# Altium PCB Smart_Reclyce_Bin.PcbDoc
Units mm, origin at the board's own origin, x right, y up, seen from the top; angles counter-clockwise.
Board outline 109.97 x 86.04 mm, 2 copper layers (Top Layer, Bottom Layer); 111 components, 161 nets, 340 pads, 98 vias.
Unrouted connection lines stored in the file: 16.
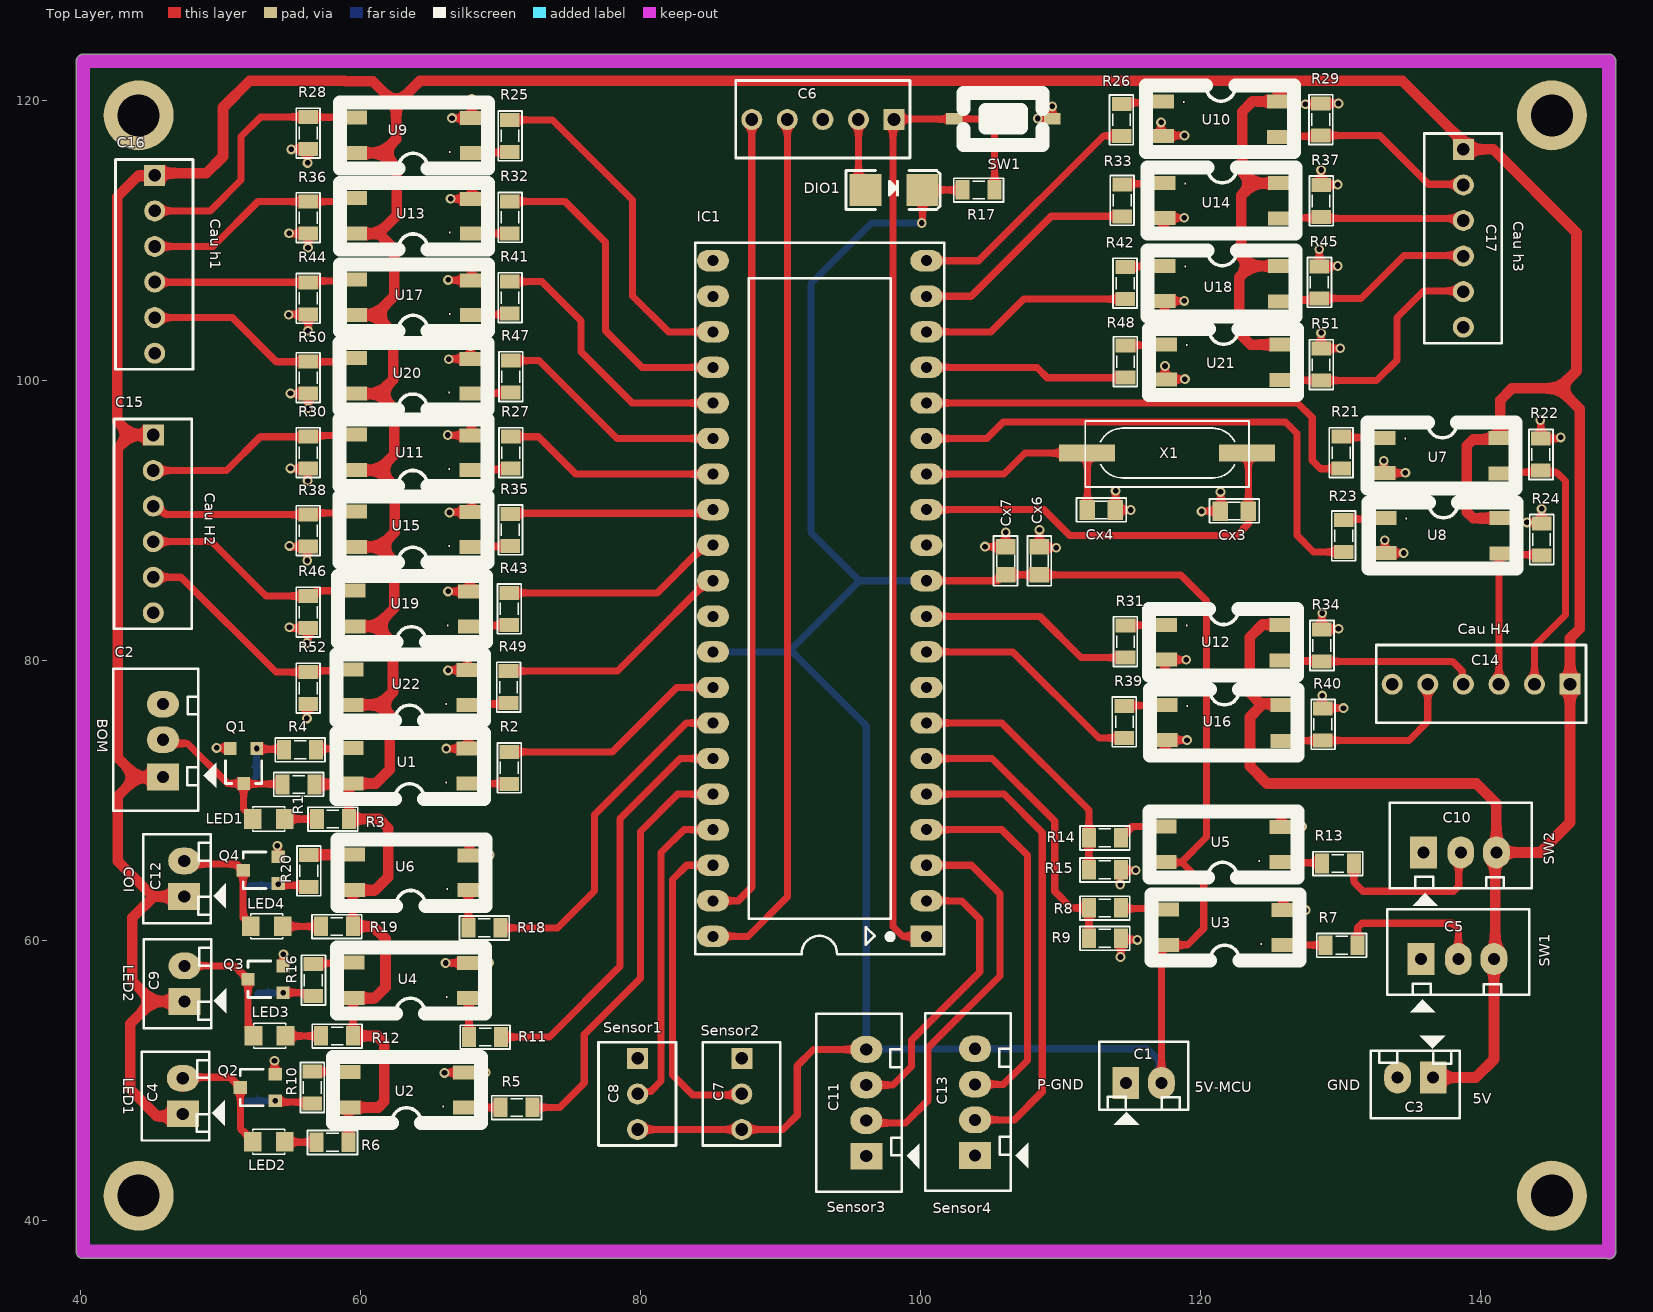
[diagram p0: Top Layer view]
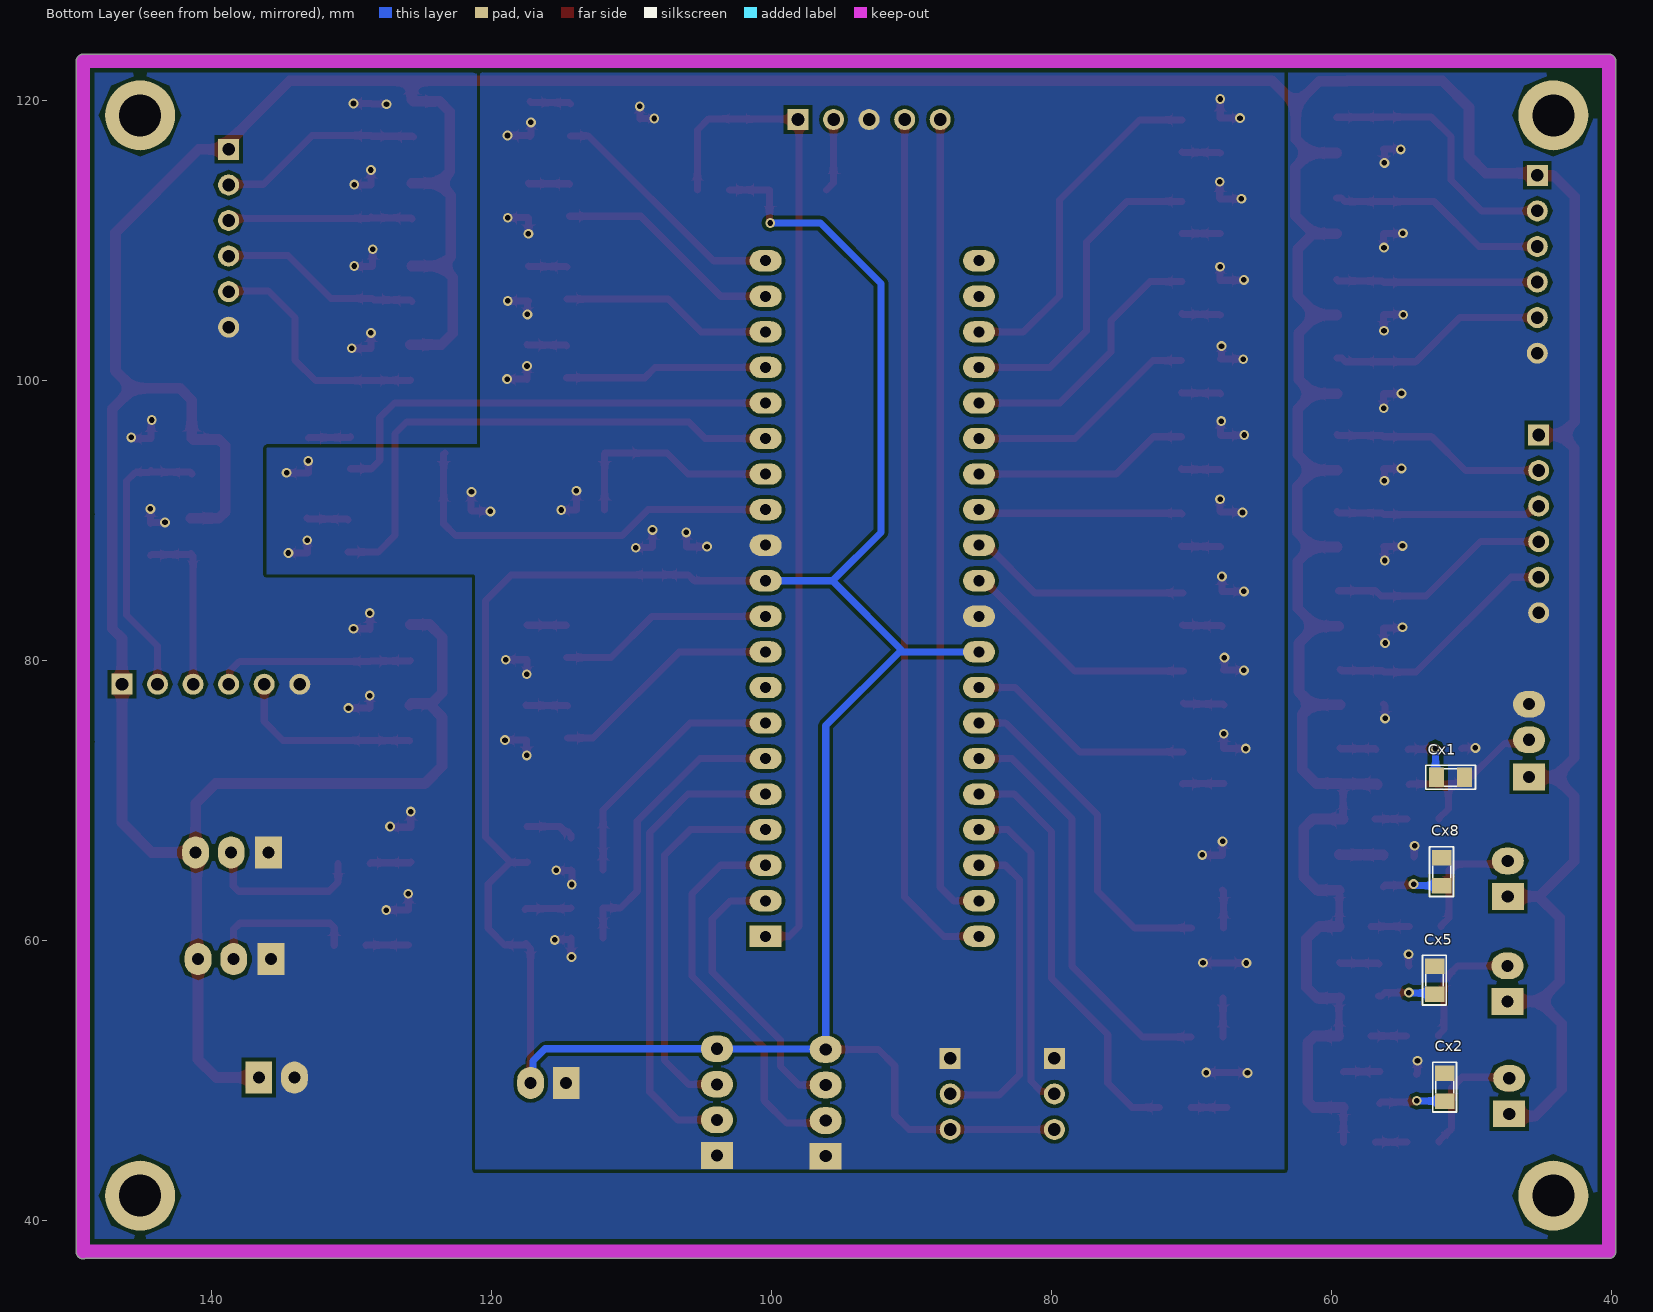
[diagram p1: Bottom Layer view, seen from below]
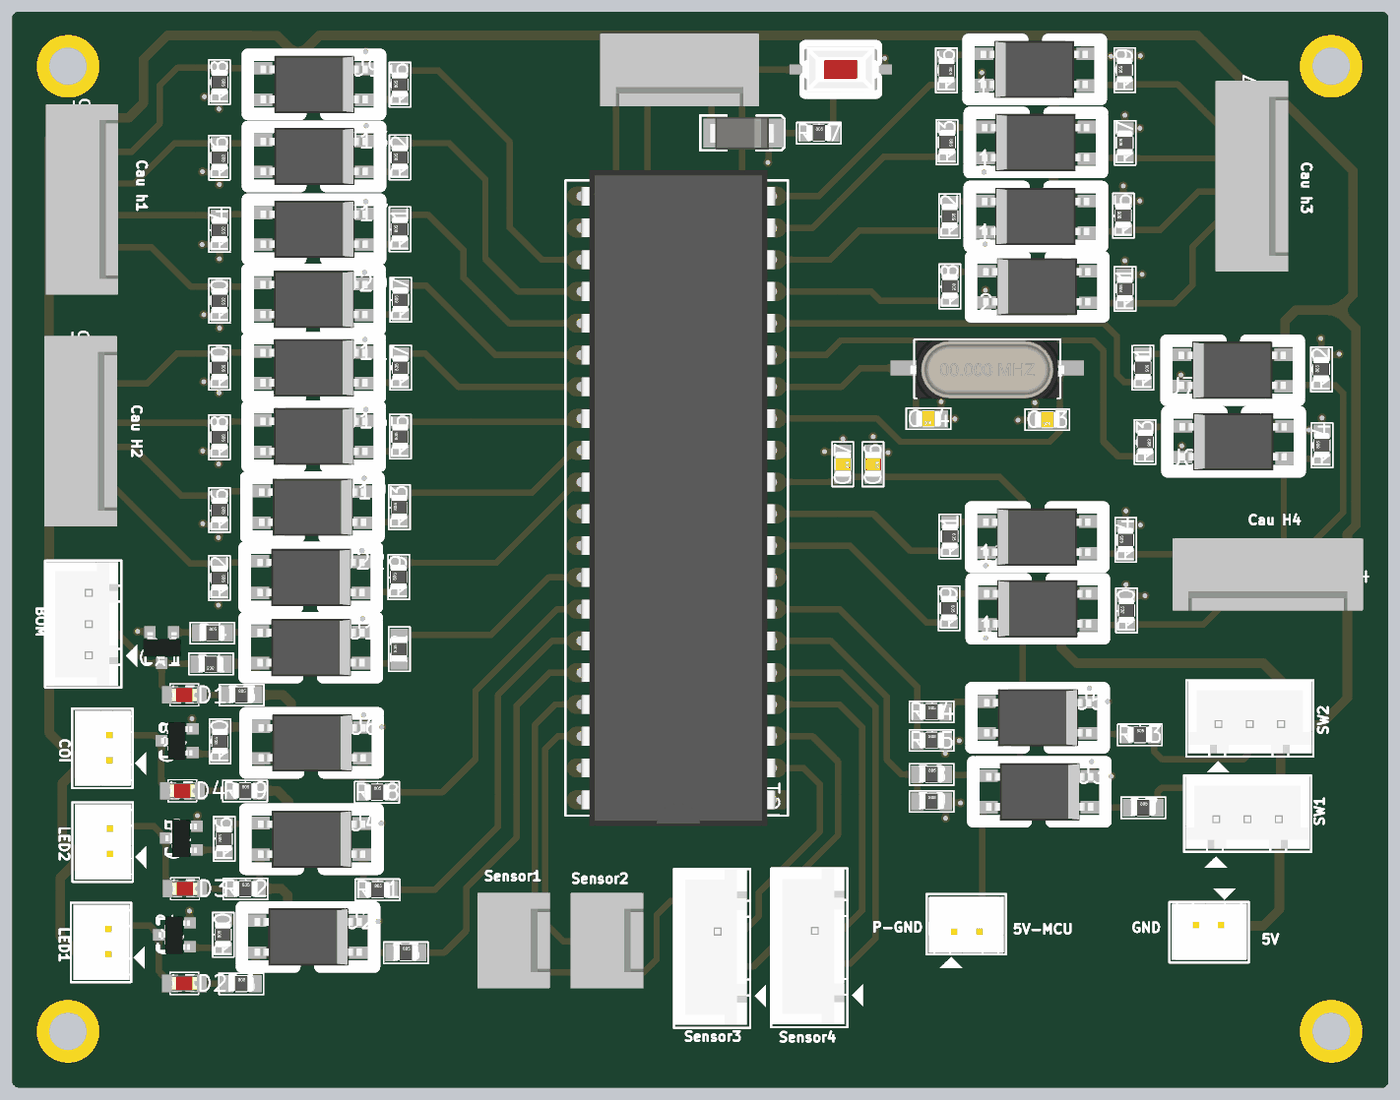
[diagram p2: 3D render of the assembled board from above, using the file's embedded part models]
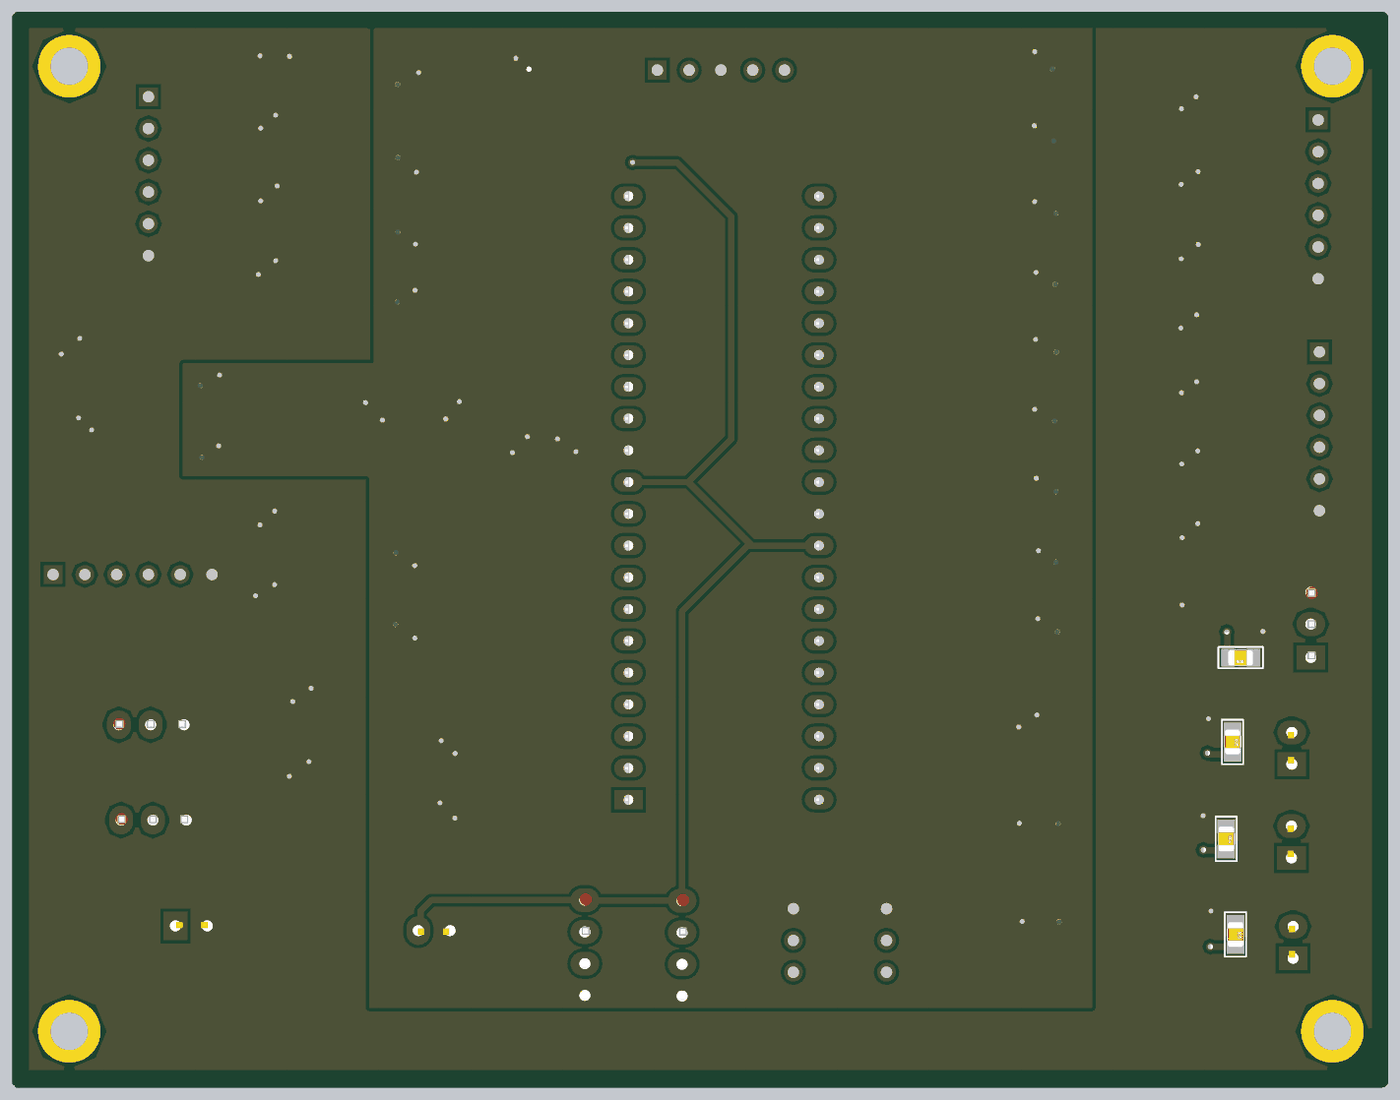
[diagram p3: 3D render of the assembled board from below, using the file's embedded part models]

## Layer stack, top to bottom
Top Solder: solder mask 0.0102, Solder Resist, Dk 3.5
Top Layer: signal copper 0.0356
Dielectric 1: dielectric 0.32, FR-4, Dk 4.8
Bottom Layer: signal copper 0.0356
Bottom Solder: solder mask 0.0102, Solder Resist, Dk 3.5

## Board outline
39.708,37.77 39.708,122.784 cw(c40.208,122.784) 40.208,123.284 149.174,123.284 cw(c149.174,122.784) 149.675,122.784 149.675,42.977 149.675,37.744 cw(c149.174,37.744) 149.017,37.269 40.208,37.269 cw(c40.208,37.77)

## Design rules (kind name [scope] priority, off if disabled: settings)
Clearance [All] p1: gap=0.254
PlaneConnect [All] p1: planeconnectstyle=Direct reliefexpansion=0.508 reliefentries=4 reliefconductorwidth=0.254 reliefairgap=0.254
PolygonConnect [All] p1: connectstyle=Direct reliefconductorwidth=0.254 reliefentries=4 polygonreliefangle="90 Angle" airgapwidth=0.254
RoutingVias [All] p1: holewidth=0.4 width=0.7 viastyle="Through Hole" minholewidth=0.4 minwidth=0.7 maxholewidth=0.4 maxwidth=0.7
SolderMaskExpansion [All] p1: expansion=0.102
Width [All] p1: maxlimit=1.016 minlimit=0.508 preferedwidth=0.762
29 further rules are at their usual default settings.

## Components (designator, comment, footprint, x,y, rotation, side; value= is the part's Value field where it differs from the comment)
C1 "Header2" Header2 114.681,49.809 r0 top
C2 "Header3" Header3 45.898,71.78 r90 top
C3 "Header2" Header2 136.627,50.19 r180 top
C4 "Header2" Header2 47.32,47.6 r90 top
C5 "Header3" Header3 135.89,58.649 r0 top
C6 "Header5" HDR5 98.12,118.618 r180 top
C7 "Header3" HDR3 87.249,51.562 r270 top
C8 "Header3" HDR3 79.807,51.562 r270 top
C9 "Header2" Header2 47.447,55.626 r90 top
C10 "Header3" Header3 136.068,66.269 r0 top
C11 "Header4" Header4 96.139,44.577 r90 top
C12 "Header2" Header2 47.422,63.119 r90 top
C13 "Header4" Header4 103.911,44.628 r90 top
C14 "Header6" HDR6 146.406,78.283 r180 top
C15 "Header6" HDR6 45.212,96.088 r270 top
C16 "Header6" HDR6 45.314,114.63 r270 top
C17 "Header6" HDR6 138.786,116.484 r270 top
Cx1 "104" CN-SMD-0805 51.511,71.628 r0 bottom
Cx2 "104" CN-SMD-0805 51.918,49.505 r270 bottom
Cx3 "33Pf" CN-SMD-0805 122.428,90.653 r180 top
Cx4 "33Pf" CN-SMD-0805 112.928,90.729 r180 top
Cx5 "104" CN-SMD-0805 52.654,57.15 r270 bottom
Cx6 "104" CN-SMD-0805 108.509,87.097 r270 top
Cx7 "104" CN-SMD-0805 106.096,87.097 r270 top
Cx8 "104" CN-SMD-0805 52.146,64.897 r270 bottom
DIO1 "Diode SMD" DIO-SMD-106 98.12,113.589 r180 top
IC1 "PIC18F4520" DIP40/W0.6 100.432,60.274 r90 top
LED1 "LED" LED-0805-Red 54.61,68.656 r180 top
LED2 "LED" LED-0805-Red 54.61,45.593 r180 top
LED3 "LED" LED-0805-Red 54.661,53.162 r180 top
LED4 "LED" LED-0805-Red 54.458,60.985 r180 top
Q1 "2SC1815" SOT23-321 51.664,72.441 r180 top
Q2 "2SC1815" SOT23-321 52.68,49.479 r90 top
Q3 "2SC1815" SOT23-321 53.233,57.211 r90 top
Q4 "2SC1815" SOT23-321 52.883,64.999 r90 top
R1 "10k" RES-SMD-0805 55.601,71.12 r180 top
R2 "330" RES-SMD-0805 70.637,72.314 r90 top
R3 "510" RES-SMD-0805 58.039,68.656 r0 top
R4 "470" RES-SMD-0805 55.702,73.609 r0 top
R5 "330" RES-SMD-0805 71.171,48.057 r0 top
R6 "510" RES-SMD-0805 58.014,45.568 r0 top
R7 "330" RES-SMD-0805 130.099,59.639 r0 top
R8 "330" RES-SMD-0805 113.182,62.306 r0 top
R9 "1k" RES-SMD-0805 113.182,60.147 r0 top
R10 "470" RES-SMD-0805 56.566,49.479 r90 top
R11 "330" RES-SMD-0805 68.91,53.086 r0 top
R12 "510" RES-SMD-0805 58.344,53.162 r0 top
R13 "330" RES-SMD-0805 129.819,65.481 r0 top
R14 "330" RES-SMD-0805 113.182,67.31 r0 top
R15 "1k" RES-SMD-0805 113.182,65.024 r0 top
R16 "470" RES-SMD-0805 56.642,57.15 r90 top
R17 "10K" RES-SMD-0805 104.165,113.589 r0 top
R18 "330" RES-SMD-0805 68.859,60.884 r0 top
R19 "510" RES-SMD-0805 58.318,60.985 r0 top
R20 "470" RES-SMD-0805 56.312,64.948 r90 top
R21 "330" RES-SMD-0805 130.073,94.818 r270 top
R22 "1k" RES-SMD-0805 144.323,94.691 r90 top
R23 "330" RES-SMD-0805 130.251,88.875 r270 top
R24 "1k" RES-SMD-0805 144.374,88.621 r90 top
R25 "330" RES-SMD-0805 70.688,117.45 r90 top
R26 "330" RES-SMD-0805 114.376,118.593 r270 top
R27 "330" RES-SMD-0805 70.739,94.818 r90 top
R28 "1k" RES-SMD-0805 56.286,117.653 r270 top
R29 "1k" RES-SMD-0805 128.6,118.618 r90 top
R30 "1k" RES-SMD-0805 56.286,94.818 r270 top
R31 "330" RES-SMD-0805 114.656,81.331 r270 top
R32 "330" RES-SMD-0805 70.688,111.633 r90 top
R33 "330" RES-SMD-0805 114.427,112.852 r270 top
R34 "1k" RES-SMD-0805 128.676,81.051 r90 top
R35 "330" RES-SMD-0805 70.714,89.306 r90 top
R36 "1k" RES-SMD-0805 56.286,111.608 r270 top
R37 "1k" RES-SMD-0805 128.626,112.801 r90 top
R38 "1k" RES-SMD-0805 56.286,89.256 r270 top
R39 "330" RES-SMD-0805 114.579,75.59 r270 top
R40 "1k" RES-SMD-0805 128.753,75.413 r90 top
R41 "330" RES-SMD-0805 70.688,105.893 r90 top
R42 "330" RES-SMD-0805 114.63,106.934 r270 top
R43 "330" RES-SMD-0805 70.637,83.668 r90 top
R44 "1k" RES-SMD-0805 56.286,105.842 r270 top
R45 "1k" RES-SMD-0805 128.499,106.985 r90 top
R46 "1k" RES-SMD-0805 56.286,83.439 r270 top
R47 "330" RES-SMD-0805 70.739,100.254 r90 top
R48 "330" RES-SMD-0805 114.656,101.321 r270 top
R49 "330" RES-SMD-0805 70.587,78.08 r90 top
R50 "1k" RES-SMD-0805 56.286,100.178 r270 top
R51 "1k" RES-SMD-0805 128.626,101.117 r90 top
R52 "1k" RES-SMD-0805 56.286,78.003 r270 top
SW1 "SW" SW1-SMD 105.918,118.669 r180 top
U1 "PC817" SO4 67.709,73.736 r180 top
U2 "PC817" SO4 67.488,50.597 r180 top
U3 "PC817" SO4 125.933,62.205 r180 top
U4 "PC817" SO4 67.767,58.42 r180 top
U5 "PC817" SO4 125.781,68.123 r180 top
U6 "PC817" SO4 67.793,66.116 r180 top
U7 "PC817" SO4 133.096,93.32 r0 top
U8 "PC817" SO4 133.172,87.605 r0 top
U9 "PC817" SO4 67.963,118.77 r180 top
U10 "PC817" SO4 117.272,117.373 r0 top
U11 "PC817" SO4 67.937,96.114 r180 top
U12 "PC817" SO4 117.475,79.985 r0 top
U13 "PC817" SO4 67.963,113.005 r180 top
U14 "PC817" SO4 117.373,111.531 r0 top
U15 "PC817" SO4 67.937,90.627 r180 top
U16 "PC817" SO4 117.533,74.244 r0 top
U17 "PC817" SO4 67.963,107.188 r180 top
U18 "PC817" SO4 117.373,105.613 r0 top
U19 "PC817" SO4 67.836,84.963 r180 top
U20 "PC817" SO4 67.937,101.575 r180 top
U21 "PC817" SO4 117.475,100 r0 top
U22 "PC817" SO4 67.709,79.35 r180 top
X1 "12Mhz" XTAL-RU49/4 122.58,94.793 r180 top

## Footprints (in the part's own frame and the unit in brackets; to place one, negate y for a bottom-side part, rotate by r counter-clockwise, add the part's x,y. Pads: shape width x height; smd on the part's side, far side on the other; paste and mask are expansions set on the pad)
CN-SMD-0805 [mm]
  rect 1.1x1.397 smd paste+0 mask-1.397: 1(-1,0) 2(1,0)
  silkscreen extent -1.78,-0.86 1.78,0.84, body extent -1,-0.62 1,0.63, height 0.8
DIO-SMD-106 [mil]
  rect 90x90.55 smd paste+0 mask-90.55: 1(80,0) 2(-80,0)
  silkscreen extent -130,-55 135,55, body extent -99,-50 106,52, height 95
DIP40/W0.6 [mil] "40 PIN, W 600mil, Pin to pin 100mil"
  rect 60x90 hole 31 paste+0 mask-90: 1(0,0)
  oval 60x90 hole 31 paste+0 mask-90: 2(100,0) 3(200,0) 4(300,0) 5(400,0) 6(500,0) 7(600,0) 8(700,0) 9(800,0) 10(900,0) 11(1000,0) 12(1100,0) 13(1200,0) 14(1300,0) 15(1400,0) 16(1500,0) 17(1600,0) 18(1700,0) 19(1800,0) 20(1900,0) 21(1900,600) 22(1800,600) 23(1700,600) 24(1600,600) 25(1500,600) 26(1400,600) 27(1300,600) 28(1200,600) 29(1100,600) 30(1000,600) 31(900,600) 32(800,600) 33(700,600) 34(600,600) 35(500,600) 36(400,600) 37(300,600) 38(200,600) 39(100,600) 40(0,600)
  silkscreen extent -50,-50 1950,650, body extent -82,-10 1982,600, height 224
HDR3 [mm] "Connector; Header; 3 Position"
  rect 1.5x1.5 hole 0.9 paste+0 mask-1.5: 1(0,0)
  round 1.5 hole 0.9 paste+0 mask-1.5: 2(2.54,0) 3(5.08,0)
  silkscreen extent -1.14,-2.79 6.22,2.74, body extent -1.27,-2.92 6.35,2.88, height 11.72
HDR5 [mm] "Connector; Header; 5 Position"
  rect 1.5x1.5 hole 0.9 paste+0 mask-1.5: 1(0,0)
  round 1.5 hole 0.9 paste+0 mask-1.5: 2(2.54,0) 3(5.08,0) 4(7.62,0) 5(10.16,0)
  silkscreen extent -1.14,-2.79 11.3,2.74, body extent -1.27,-2.92 11.43,2.88, height 11.72
HDR6 [mm] "Connector; Header; 6 Position"
  rect 1.5x1.5 hole 0.9 paste+0 mask-1.5: 1(0,0)
  round 1.5 hole 0.9 paste+0 mask-1.5: 2(2.54,0) 3(5.08,0) 4(7.62,0) 5(10.16,0) 6(12.7,0)
  silkscreen extent -1.14,-2.79 13.84,2.74, body extent -1.27,-2.92 13.97,2.88, height 11.72
Header2 [mil] "CON2"
  rect 75x90 hole 34 paste+0 mask-90: 1(0,0)
  oval 75x90 hole 34 paste+0 mask-90: 2(100,0)
  silkscreen extent -75,-118 175,115, body extent -68,-70 168,107, height 236
Header3 [mil] "CON 3"
  rect 75x90 hole 34 paste+0 mask-90: 1(-5,0)
  oval 75x90 hole 34 paste+0 mask-90: 2(100,0) 3(200,0)
  silkscreen extent -100,-150 300,140, body extent -95,-90 295,136, height 276
Header4 [mil] "CON4"
  rect 75x90 hole 34 paste+0 mask-90: 1(0,0)
  oval 75x90 hole 34 paste+0 mask-90: 2(100,0) 3(200,0) 4(300,0)
  silkscreen extent -100,-150 400,140, body extent -90,-90 398,136, height 276
LED-0805-Red [mil]
  rect 50x55 smd paste+0 mask-55: 1(0,0) 2(90,0)
  silkscreen extent 0,-35 90,35, body extent 5,-25 85,25, height 43
RES-SMD-0805 [mil]
  rect 39.37x55 smd paste+0 mask-55: 1(-45,0) 2(45,0)
  silkscreen extent -70,-34 70,33, body extent -39,-25 39,25, height 31
SO4 [mm]
  rect 1.7x1 smd paste+0 mask-1.7: 1(0,2.54) 2(0,0.051) 3(8.324,0) 4(8.324,2.54)
  silkscreen extent -1.14,-1.07 9.42,3.66, body extent -0.17,-0.99 8.4,3.59, height 3.72
SOT23-321 [mm]
  rect 0.9x0.95 smd mask+0: 1(0.95,-1.25)
  rect 0.9x0.95 smd paste+0 mask-0.95: 2(0,1.25) 3(-0.95,-1.25)
  silkscreen extent -1.3,-0.38 1.3,1.25, body extent -1.52,-1.23 1.48,1.27, height 1.06
SW1-SMD [mm]
  rect 1.2x0.8 smd paste+0 mask-1.2: 1(-3.5,0) 2(3.5,0)
  silkscreen extent -2.82,-1.85 2.82,1.85, body extent -3.05,-1.85 3.05,1.85, height 2.5
XTAL-RU49/4 [mm]
  rect 4x1.2 smd paste+0 mask-4: 1(-0.762,0) 2(10.668,0)
  silkscreen extent -0.89,-2.29 10.8,2.41, body extent -1.2,-2.22 11.1,2.48, height 4.3

## Part data
C1 C3 C4 C9 C12: "Header IDC, 2 x 1 Pin Vertical 2.54mm Pitch (Non-Boxed, Male)"
C2 C5 C7 C8 C10: "Header IDC, 3 x 1 Pin Vertical 2.54mm Pitch (Non-Boxed, Male)"
C6: "Header IDC, 5 x 1 Pin Vertical 2.54mm Pitch (Non-Boxed, Male)"
C11 C13: "Header IDC, 4 x 1 Pin Vertical 2.54mm Pitch (Non-Boxed, Male)"
C14 C15 C16 C17: "Header IDC, 6 x 1 Pin Vertical 2.54mm Pitch (Non-Boxed, Male)"
Cx1 Cx2 Cx3 Cx4 Cx5 Cx6 Cx7 Cx8: library part CN
DIO1: "Default Diode"
IC1: "32KB Flash, 1536B RAM, 256B EFROM, 40-Pin PDIP"
LED1 LED2 LED3 LED4: library part "LED SMD"
Q1 Q2 Q3 Q4: "NPN 600mW, ECB"
R1 R2 R3 R4 R5 R6 R7 R8 R9 R10 R11 R12 R13 R14 R15 R16 R17 R18 R19 R20 R21 R22 R23 R24 R25 R26 R27 R28 R29 R30 R31 R32 R33 R34 R35 R36 R37 R38 R39 R40 R41 R42 R43 R44 R45 R46 R47 R48 R49 R50 R51 R52: library part Res-SMD, "Resistor"
SW1: library part SW2, "Switch button 2 pin"
U1 U2 U3 U4 U5 U6 U7 U8 U9 U10 U11 U12 U13 U14 U15 U16 U17 U18 U19 U20 U21 U22: "Single Opto"
X1: library part XT2, "Crystal, 32.768 KHz, -40 to 85 degC, 3.2 x 1.5 x 0.9 mm SMD"

## Free pads (board coordinates)
  round 5 hole 3 paste+0 mask+0: 2(44.171,41.758) 2(44.171,118.923) 2(145.11,41.758) 2(145.11,118.923)

## Via types
v1: diameter 0.7, hole 0.4, Top Layer to Bottom Layer, tented both sides, 98 vias

## Nets (pads, with @x,y where several pads share a name; then routed paths per layer and width w, separated by ;. In a path a pad name is that pad's centre, name@x,y a point inside that pad or via, vN(x,y) a via of type N, cw(c..) or ccw(c..) an arc to the next point about the centre after c; other vN are vias at no path point)
1: 
2: 
3: 
4: 
5: 
5V: C2.1 C3.1 C4.1 C5.3 C9.1 C10.3 C12.1 C14.1 C15.1 C16.1 C17.1 R1.1 R3.2 R6.2 R12.2 R19.2 U1.4 U2.4 U4.4 U6.4 U7.4 U8.4 U9.4 U10.4 U11.4 U12.4 U13.4 U14.4 U15.4 U16.4 U17.4 U18.4 U19.4 U20.4 U21.4 U22.4 | length 461.4
  Top Layer w0.508: R6.2 59.157,48.049 U2.4 ; R3.2 59.182,70.993 U1.4@59.347,71.158 ; R19.2 U6.4@59.461,63.569 ; U4.4@59.469,55.855 59.487,55.837 R12.2
  Top Layer w0.762: 45.212,63.094 42.672,65.634 42.672,70.282 44.044,71.653 ; C15.1 43.612,96.088 ; C2.1 44.044,71.653 ; C4.1 47.153,47.433 45.481,47.433 43.561,49.352 43.561,54.026 45.161,55.626 ; C12.1 45.237,63.119 43.713,61.595 43.713,57.074 45.161,55.626 ; C9.1 45.161,55.626 ; R1.1 56.782,71.158 59.347,71.158 U1.4 61.112,71.196 62.103,72.187 62.103,76.124 61.417,76.81 ; U2.4 61.276,48.057 61.722,48.503 61.722,52.654 61.214,53.162 R12.2 ; R3.2 61.341,68.656 62.001,67.996 62.001,64.516 61.054,63.569 U6.4@59.461,63.569 ; U22.4 61.417,76.81 ; U4.4 59.469,55.855 61.011,55.855 61.798,56.642 61.798,60.096 60.909,60.985 R19.2 ; U19.4 61.138,82.423 ; U15.4 61.392,88.087 ; U11.4 61.316,93.574 ; U20.4 61.341,99.035 ; U17.4 59.649,104.658 61.072,104.658 ; U13.4 61.316,110.465 ; U9.4 61.57,116.23 ; 124.265,76.665 123.546,75.946 123.546,72.415 124.765,71.196 139.7,71.196 141.148,69.748 C10.3 ; U18.4 123.596,108.153 ; U14.4 123.8,114.071 ; U12.4 125.773,82.55 124.435,82.55 123.52,81.636 123.52,77.673 124.29,76.903 125.738,76.903 U16.4 ; U21.4 123.596,102.54 122.784,103.353 122.784,107.34 123.596,108.153 ; C3.1 139.675,50.19 140.97,51.486 C5.3 141.059,58.737 141.059,66.18 C10.3 ; U8.4 139.486,90.145 139.04,90.591 139.04,95.312 139.486,95.758 141.318,95.758 U7.4 141.42,98.57 142.265,99.416 145.618,99.416 ; 43.612,96.088 42.672,95.148 42.672,73.025 44.044,71.653 ; 43.612,96.088 42.647,97.053 42.647,113.106 44.145,114.605 45.288,114.605 45.473,114.789 48.997,114.789 50.19,115.983 50.19,119.482 52.095,121.387 58.877,121.387 58.903,121.361 60.884,121.361 62.56,119.685 ; 61.072,104.658 62.357,103.373 62.357,100.051 61.341,99.035 ; 61.072,104.658 62.433,106.02 62.433,109.372 61.341,110.465 61.316,110.465 ; 61.138,82.423 62.332,81.229 62.332,77.724 61.417,76.81 ; 61.138,82.423 62.433,83.718 62.433,87.046 61.392,88.087 ; 61.316,93.574 62.459,92.431 62.459,89.154 61.392,88.087 ; 61.316,93.574 62.433,94.691 62.433,97.942 61.341,99.035 ; 61.316,110.465 62.611,111.76 62.611,115.189 61.57,116.23 ; 61.57,116.23 62.56,117.221 62.56,119.685 ; 62.56,119.685 64.262,121.387 125.705,121.387 ; 123.596,108.153 122.911,108.839 122.911,113.182 123.8,114.071 ; 123.8,114.071 122.987,114.884 122.987,119.177 123.723,119.913 U10.4 125.705,120.023 125.705,121.387 ; 125.705,121.387 134.417,121.387 138.811,116.992 138.811,116.51 C17.1 140.919,116.484 146.863,110.541 146.863,100.66 145.618,99.416 ; C10.3 144.272,66.269 146.406,68.402 C14.1 146.406,81.559 147.091,82.245 147.091,97.942 145.618,99.416
5V_MCU: C1.2 C7.3 C8.3 C11.4 C13.4 Cx6.2 Cx7.2 DIO1.2 IC1.11 IC1.32 R17.1 U3.4 U5.4 | length 189.7
  Top Layer w0.508: C8.3 C7.3 90.195,46.482 91.211,47.498 91.211,51.029 92.38,52.197 C11.4 ; v1(100.101,111.227) 100.152,111.277 DIO1.2 R17.1 ; IC1.11 105.525,85.674 105.947,86.096 Cx7.2 Cx6.2 118.602,86.096 120.447,84.252 120.447,67.361 118.694,65.608 118.694,65.557 ; C1.2 117.221,59.419 U3.4@117.569,59.766 ; U5.4 117.483,65.557 118.694,65.557 ; U3.4 119.075,59.665 120.244,60.833 120.244,64.008 118.694,65.557
  Bottom Layer w0.508: IC1.32 90.576,80.594 ; v1(100.101,111.227) 96.52,111.227 92.202,106.909 92.202,89.129 95.656,85.674 ; IC1.11 95.656,85.674 ; C1.2 117.043,49.987 117.043,51.384 116.18,52.248 C13.4 103.886,52.222 96.164,52.222 C11.4 96.139,75.336 90.881,80.594 90.576,80.594 ; 90.576,80.594 95.656,85.674
6: 
7: 
8: 
24V: 
BOM: IC1.33 R2.2 | length 16.5
  Top Layer w0.508: R2.2 78.003,73.457 82.601,78.054 IC1.33
COI: IC1.34 R18.2 | length 24.4
  Top Layer w0.508: R18.2 74.092,60.884 76.733,63.525 76.733,68.961 83.287,75.514 IC1.34
DC1: IC1.23 R25.2 | length 24.8
  Top Layer w0.508: R25.2 73.736,118.593 79.451,112.878 79.451,106.02 82.017,103.454 IC1.23
DC2: IC1.24 R32.2 | length 23.1
  Top Layer w0.508: R32.2 74.6,112.776 77.521,109.855 77.521,103.53 80.137,100.914 IC1.24
DC3: IC1.25 R41.2 | length 19.4
  Top Layer w0.508: R41.2 72.974,107.036 75.768,104.242 75.768,102.032 79.426,98.374 IC1.25
DC4: IC1.26 R47.2 | length 16.8
  Top Layer w0.508: R47.2 72.771,101.397 78.334,95.834 IC1.26
DC5: IC1.27 R27.2 | length 15.6
  Top Layer w0.508: R27.2 72.72,95.961 75.387,93.294 IC1.27
DC6: IC1.28 R35.2 | length 14.6
  Top Layer w0.508: R35.2 70.764,90.5 84.282,90.5 84.536,90.754 IC1.28
DC7: IC1.29 R43.2 | length 16
  Top Layer w0.508: R43.2 81.204,84.811 84.607,88.214 IC1.29
DC8: IC1.30 R49.2 | length 17.3
  Top Layer w0.508: R49.2 78.359,79.223 80.162,81.026 84.811,85.674 IC1.30
DC9: IC1.20 R26.2 | length 17.6
  Top Layer w0.508: IC1.20 104.165,108.534 113.081,117.45 R26.2
DC10: IC1.19 R33.2 | length 16.4
  Top Layer w0.508: IC1.19 103.632,105.994 109.347,111.709 R33.2
DC11: IC1.18 R42.2 | length 15.2
  Top Layer w0.508: IC1.18 105.054,103.454 107.391,105.791 R42.2
DC12: IC1.17 R48.2 | length 14.5
  Top Layer w0.508: IC1.17 108.331,100.914 109.068,100.178 R48.2
DC13: IC1.16 R21.2 | length 33.4
  Top Layer w0.508: IC1.16 126.949,98.374 127.991,97.333 127.991,94.259 128.575,93.675 R21.2
DC14: IC1.15 R23.2 | length 38.4
  Top Layer w0.508: IC1.15 104.75,95.834 105.918,97.003 126.086,97.003 126.898,96.19 126.898,88.925 128.092,87.732 R23.2
DC15: IC1.10 R31.2 | length 15.4
  Top Layer w0.508: IC1.10 108.534,83.134 111.481,80.188 R31.2
DC16: IC1.9 R39.2 | length 16.7
  Top Layer w0.508: IC1.9 106.604,80.594 112.751,74.447 R39.2
E1: 
E2: 
E3: 
E4: 
E5: 
E6: 
E7: 
E8: 
EN1: C16.2 R28.1 U9.3 | length 18.9
  Top Layer w0.508: C16.2 49.276,112.09 51.486,114.3 51.486,117.399 52.883,118.796 R28.1 56.299,118.783 59.626,118.783 U9.3
EN2: C16.3 R36.1 U13.3 | length 15.8
  Top Layer w0.508: C16.3 49.479,109.55 52.68,112.751 R36.1 59.035,112.751 59.289,113.005 U13.3
EN3: C16.4 R44.1 U17.3 | length 14.4
  Top Layer w0.508: C16.4 45.326,106.998 56.274,106.998 R44.1 56.388,107.086 59.538,107.086 U17.3
EN4: C16.5 R50.1 U20.3 | length 15.7
  Top Layer w0.508: C16.5 50.851,104.47 54,101.321 R50.1 59.01,101.321 59.264,101.575 U20.3
EN5: C15.2 R30.1 U11.3 | length 15.5
  Top Layer w0.508: C15.2 50.444,93.548 52.857,95.961 R30.1 56.363,96.037 59.538,96.037 U11.3
EN6: C15.3 R38.1 U15.3 | length 14.7
  Top Layer w0.508: C15.3 45.48,91.008 46.09,90.399 R38.1 56.401,90.513 59.5,90.513 U15.3
EN7: C15.4 R46.1 U19.3 | length 16.1
  Top Layer w0.508: C15.4 49.378,88.468 53.264,84.582 R46.1 56.485,84.582 56.866,84.963 U19.3
EN8: C15.5 R52.1 U22.3 | length 17.1
  Top Layer w0.508: C15.5 47.193,85.928 53.975,79.146 R52.1 56.388,79.248 59.284,79.248 U22.3
EN9: C17.2 R29.1 U10.3 | length 14.7
  Top Layer w0.508: U10.3 125.646,117.424 128.549,117.424 R29.1 132.817,117.475 136.296,113.995 C17.2@138.786,113.995
EN10: C17.3 R37.1 U14.3 | length 13.2
  Top Layer w0.508: U14.3 125.76,111.595 128.562,111.595 R37.1 128.727,111.557 138.684,111.557 C17.3@138.786,111.455
EN11: C17.4 R45.1 U18.3 | length 14.5
  Top Layer w0.508: U18.3 125.811,105.727 128.384,105.727 R45.1 131.47,105.842 134.544,108.915 C17.4@138.786,108.915
EN12: C17.5 R51.1 U21.3 | length 17.4
  Top Layer w0.508: U21.3 125.811,99.987 128.613,99.987 R51.1 132.588,99.974 134.036,101.422 134.036,104.47 135.941,106.375 C17.5@138.786,106.375
EN13: C14.2 R22.1 U7.3 | length 20.5
  Top Layer w0.508: U7.3 141.534,93.434 144.209,93.434 R22.1 144.454,93.417 145.452,93.417 146.075,92.794 146.075,83.236 143.866,81.026 C14.2
EN14: C14.3 R24.1 U8.3 | length 12.3
  Top Layer w0.508: C14.3 141.326,87.434 U8.3 141.559,87.541 144.31,87.541 R24.1
EN15: C14.4 R34.1 U12.3 | length 14.2
  Top Layer w0.508: U12.3 125.837,79.946 128.638,79.946 R34.1 138.024,79.908 138.709,79.223 138.709,78.359 C14.4
EN16: C14.5 R40.1 U16.3 | length 13.6
  Top Layer w0.508: U16.3 125.87,74.257 128.74,74.257 R40.1 134.899,74.27 136.246,75.616 C14.5
GND: C2.3 C3.2 C5.1 C10.1 C14.6 C15.6 C16.6 C17.6 Cx1.1 Cx2.1 Cx5.1 Cx8.1 Q1.1 Q2.1 Q3.1 Q4.1 R22.2 R24.2 R28.2 R29.2 R30.2 R34.2 R36.2 R37.2 R38.2 R40.2 R44.2 R45.2 R46.2 R50.2 R51.2 R52.2 U3.2 U5.2 | length 46.1
  Top Layer w0.508: v1(49.733,73.736) 50.668,73.736 Q1.1 ; v1(53.873,51.384) 53.873,50.485 Q2.1 ; v1(54.077,66.751) 54.105,66.723 54.105,65.977 Q4.1 ; Q3.1 54.508,58.186 v1(54.508,59.004) ; v1(54.889,104.673) 54.915,104.699 R44.2 56.286,103.556 v1(56.261,103.53) ; v1(54.915,110.49) 54.94,110.465 R36.2 56.286,109.499 v1(56.261,109.474) ; v1(54.94,82.347) 54.991,82.296 R46.2 56.286,81.331 v1(56.185,81.229) ; v1(54.94,88.163) 54.991,88.113 R38.2 56.21,88.036 v1(56.21,87.122) ; v1(55.016,93.701) 55.042,93.675 R30.2 56.236,93.624 v1(56.236,92.812) ; v1(55.016,99.06) 55.042,99.035 R50.2 v1(56.286,97.993) ; v1(55.067,116.484) 55.093,116.51 R28.2 56.236,116.459 v1(56.236,115.519) ; v1(56.185,75.844) 56.185,76.759 R52.2 ; v1(125.781,69.19) U5.2 127.203,68.072 v1(127.254,68.123) ; v1(125.959,63.322) 125.933,63.297 U3.2 v1(127.533,62.154) ; v1(127.508,119.71) 127.533,119.736 128.575,119.736 R29.2 v1(129.87,119.761) ; v1(128.499,109.347) R45.2 129.794,108.128 v1(129.819,108.153) ; v1(128.626,103.378) R51.2 129.972,102.26 v1(129.997,102.286) ; v1(128.626,115.011) R37.2 129.794,113.944 v1(129.819,113.97) ; v1(128.702,77.47) 128.702,76.606 R40.2 128.778,76.581 v1(130.226,76.581) ; v1(128.702,83.363) 128.676,83.337 R34.2 128.727,82.245 v1(129.87,82.245) ; v1(143.332,89.84) 144.297,89.84 R24.2 v1(144.374,90.805) ; v1(144.272,97.155) 144.323,97.104 R22.2 145.669,95.834 v1(145.745,95.91)
IN1: C5.2 R7.2 | length 10.9
  Top Layer w0.508: R7.2 131.242,60.916 131.539,61.214 137.998,61.214 138.43,60.782 C5.2
IN2: C10.2 R13.2 | length 11.7
  Top Layer w0.508: R13.2 130.962,64.16 131.623,63.5 138.074,63.5 138.455,63.881 138.455,66.116 C10.2
LED1: IC1.36 R5.2 | length 30.3
  Top Layer w0.508: R5.2 74.244,48.057 75.997,49.809 75.997,53.264 80.01,57.277 80.01,67.767 82.677,70.434 IC1.36
LED2: IC1.35 R11.2 | length 29.6
  Top Layer w0.508: R11.2 73.508,53.086 78.537,58.115 78.537,68.656 82.855,72.974 IC1.35
NetC2_2: C2.2 LED1.2 Q1.2 R1.2 | length 12.7
  Top Layer w0.508: C2.2 46.165,74.053 47.664,74.053 50.526,71.191 Q1.2 ; LED1.2 52.324,68.72 51.664,69.38 Q1.2 ; R1.2 54.422,71.155 51.699,71.155 Q1.2
NetC4_2: C4.2 LED2.2 Q2.2 | length 8.8
  Top Layer w0.508: C4.2@47.32,49.428 C4.2@47.346,49.454 ; C4.2 47.396,50.216 50.693,50.216 51.209,49.7 51.209,49.675 51.405,49.479 Q2.2 51.43,46.551 52.324,45.657 LED2.2
NetC6_2: C6.2 DIO1.1 | length 5.2
  Top Layer w0.508: C6.2 95.58,114.097 DIO1.1
NetC9_2: C9.2 LED3.2 Q3.2 | length 9.1
  Top Layer w0.508: C9.2 51.003,58.166 51.958,57.211 Q3.2 51.983,53.618 52.375,53.226 LED3.2
NetC12_2: C12.2 LED4.2 Q4.2 | length 8.7
  Top Layer w0.508: C12.2 47.65,65.43 51.176,65.43 51.608,64.999 Q4.2 51.633,61.588 52.172,61.049 LED4.2
NetC28_1: 
NetC30_1: 
NetC36_2: 
NetC39_1: 
NetC42_2: 
NetC45_1: 
NetCx1_2: Cx1.2 Q1.3 R4.1 | length 4.1
  Top Layer w0.508: v1(52.614,73.691) 52.654,73.65 54.518,73.65 R4.1
  Bottom Layer w0.508: Cx1.2 52.578,71.695 52.578,73.655 v1(52.614,73.691)
NetCx2_2: Cx2.2 Q2.3 R10.1 | length 4.7
  Top Layer w0.508: v1(53.93,48.529) 54.026,48.433 56.469,48.433 R10.1
  Bottom Layer w0.508: Cx2.2 51.93,48.517 53.917,48.517 v1(53.93,48.529)
NetCx5_2: Cx5.2 Q3.3 R16.1 | length 4.1
  Top Layer w0.508: v1(54.483,56.261) 56.189,56.261 56.444,56.007 R16.1
  Bottom Layer w0.508: Cx5.2 52.728,56.224 54.446,56.224 v1(54.483,56.261)
NetCx8_2: Cx8.2 Q4.3 R20.1 | length 4.4
  Top Layer w0.508: v1(54.153,64.008) 54.133,64.028 Q4.3 54.255,63.927 56.19,63.927 R20.1
  Bottom Layer w0.508: Cx8.2 53.99,63.897 54.101,64.008 v1(54.153,64.008)
NetCx9_1: 
NetCx9_2: 
NetCx10_1: 
NetCx10_2: 
NetCx11_1: 
NetCx11_2: 
NetCx12_1: 
NetCx12_2: 
NetCx15_1: 
NetCx16_2: 
NetD1_1: 
NetD2_1: 
NetD5_1: 
NetD6_1: 
NetDIO2_2: 
NetDIO3_2: 
NetDIO4_1: 
NetDIO5_1: 
NetDIO6_2: 
NetDIO7_2: 
NetDIO8_1: 
NetDIO9_1: 
NetIC3_2: 
NetIC3_6: 
NetIC4_2: 
NetIC4_6: 
NetJ5_1: 
NetLED1_1: LED1.1 R3.1 | length 2.3
  Top Layer w0.508: LED1.1 R3.1
NetLED2_1: LED2.1 R6.1 | length 2.3
  Top Layer w0.508: LED2.1 54.623,45.58 56.858,45.58 R6.1
NetLED3_1: LED3.1 R12.1 | length 2.5
  Top Layer w0.508: LED3.1 R12.1
NetLED4_1: LED4.1 R19.1 | length 2.7
  Top Layer w0.508: LED4.1 R19.1
NetLED5_1: 
NetLED6_1: 
NetQ9_1: 
NetQ9_3: 
NetQ10_1: 
NetQ10_3: 
NetQ18_1: 
NetQ18_3: 
NetQ19_1: 
NetQ19_3: 
NetR2_1: R2.1 U1.1 | length 2.9
  Top Layer w0.508: U1.1 67.722,71.183 70.625,71.183 R2.1
NetR4_2: R4.2 U1.3 | length 2.6
  Top Layer w0.508: R4.2 56.909,73.673 59.322,73.673 U1.3
NetR5_1: R5.1 U2.1 | length 2.5
  Top Layer w0.508: U2.1 R5.1
NetR7_1: R7.1 U3.1 | length 3
  Top Layer w0.508: U3.1 125.946,59.652 128.943,59.652 R7.1
NetR8_2: R8.2 U3.3 | length 3.3
  Top Layer w0.508: R8.2 114.376,62.255 117.559,62.255 U3.3
NetR10_2: R10.2 U2.3 | length 2.6
  Top Layer w0.508: R10.2 56.578,50.609 59.152,50.609 U2.3
NetR11_1: R11.1 U4.1 | length 2.8
  Top Layer w0.508: R11.1 U4.1
NetR13_1: R13.1 U5.1 | length 2.9
  Top Layer w0.508: U5.1 125.832,65.532 128.626,65.532 R13.1
NetR14_2: R14.2 U5.3 | length 3.6
  Top Layer w0.508: R14.2 114.325,67.508 114.571,67.754 114.77,67.754 115.138,68.123 U5.3
NetR16_2: R16.2 U4.3 | length 2.9
  Top Layer w0.508: R16.2 56.706,58.356 59.38,58.356 U4.3
NetR18_1: R18.1 U6.1 | length 2.7
  Top Layer w0.508: R18.1 67.716,63.5 U6.1
NetR20_2: R20.2 U6.3 | length 3.2
  Top Layer w0.762: R20.2 56.325,66.103 59.456,66.103 U6.3
NetR21_1: R21.1 U7.1 | length 3.1
  Top Layer w0.508: R21.1 130.124,95.91 133.045,95.91 U7.1
NetR23_1: R23.1 U8.1 | length 3
  Top Layer w0.508: R23.1 130.315,90.081 133.109,90.081 U8.1
NetR25_1: R25.1 U9.1 | length 2.8
  Top Layer w0.508: U9.1 68.001,116.268 70.65,116.268 R25.1
NetR26_1: R26.1 U10.1 | length 3
  Top Layer w0.508: R26.1 114.465,119.825 117.183,119.825 U10.1
NetR27_1: R27.1 U11.1 | length 2.8
  Top Layer w0.508: U11.1 67.988,93.624 70.688,93.624 R27.1
NetR31_1: R31.1 U12.1 | length 2.8
  Top Layer w0.508: R31.1 114.681,82.499 117.45,82.499 U12.1
NetR32_1: R32.1 U13.1 | length 2.7
  Top Layer w0.508: U13.1 67.975,110.477 70.676,110.477 R32.1
NetR33_1: R33.1 U14.1 | length 3
  Top Layer w0.508: R33.1 114.465,114.033 117.335,114.033 U14.1
NetR35_1: R35.1 U15.1 | length 2.8
  Top Layer w0.508: U15.1 67.975,88.125 70.676,88.125 R35.1
NetR39_1: R39.1 U16.1 | length 3
  Top Layer w0.508: R39.1 114.605,76.759 117.508,76.759 U16.1
NetR41_1: R41.1 U17.1 | length 2.8
  Top Layer w0.508: U17.1 68.014,104.699 70.637,104.699 R41.1
NetR42_1: R42.1 U18.1 | length 2.8
  Top Layer w0.508: R42.1 114.668,108.115 117.335,108.115 U18.1
NetR43_1: R43.1 U19.1 | length 2.8
  Top Layer w0.508: U19.1 67.887,82.474 70.587,82.474 R43.1
NetR47_1: R47.1 U20.1 | length 2.8
  Top Layer w0.508: U20.1 67.975,99.073 70.701,99.073 R47.1
NetR48_1: R48.1 U21.1 | length 2.9
  Top Layer w0.508: R48.1 114.694,102.502 117.437,102.502 U21.1
NetR49_1: R49.1 U22.1 | length 2.9
  Top Layer w0.508: U22.1 67.772,76.873 70.523,76.873 R49.1
OSC1: Cx3.1 IC1.13 X1.1 | length 29.2
  Top Layer w0.508: IC1.13 108.814,90.754 110.668,88.9 122.58,88.9 123.428,89.747 Cx3.1 123.428,94.707 X1.1
OSC2: Cx4.2 IC1.14 X1.2 | length 16.2
  Top Layer w0.508: IC1.14 105.969,93.294 107.467,94.793 X1.2 111.928,94.777 Cx4.2
OUT1: 
OUT2: 
P_GND: C1.1 C6.3 C7.1 C8.1 C11.1 C13.1 Cx3.2 Cx4.1 Cx6.1 Cx7.1 IC1.12 IC1.31 R9.2 R15.2 SW1.1 U1.2 U2.2 U4.2 U6.2 U7.2 U8.2 U9.2 U10.2 U11.2 U12.2 U13.2 U14.2 U15.2 U16.2 U17.2 U18.2 U19.2 U20.2 U21.2 U22.2 | length 69
  Top Layer w0.508: v1(66.015,50.521) 66.04,50.546 U2.2 v1(68.961,50.546) ; v1(66.091,58.369) U4.2 69.164,58.369 v1(69.19,58.395) ; v1(66.142,73.685) U1.2 67.709,74.745 v1(67.716,74.752) ; v1(66.243,96.088) 66.269,96.063 U11.2 67.937,97.036 v1(67.894,97.079) ; v1(66.269,79.273) 66.294,79.299 U22.2 67.666,79.342 v1(67.666,80.188) ; v1(66.269,84.912) U19.2 67.836,85.971 v1(67.843,85.979) ; v1(66.269,107.163) 66.294,107.137 U17.2 67.97,107.145 v1(67.97,108.102) ; v1(66.319,101.498) 66.345,101.524 U20.2 67.869,101.592 v1(67.869,102.438) ; v1(66.37,90.551) 66.396,90.576 U15.2 67.97,90.609 v1(67.97,91.491) ; v1(66.446,112.954) U13.2 67.996,112.987 v1(67.996,114.173) ; v1(66.548,118.72) U9.2 v1(67.963,120.084) ; v1(67.793,67.056) U6.2 69.215,66.065 v1(69.24,66.091) ; v1(104.623,88.113) 104.639,88.096 Cx7.1 v1(106.096,89.129) ; v1(108.382,118.694) 109.393,118.694 SW1.1 109.418,119.553 v1(109.423,119.558) ; v1(108.509,89.306) Cx6.1 108.569,88.036 v1(109.703,88.036) ; v1(113.944,92.1) 113.944,90.745 Cx4.1 v1(115.037,90.729) ; v1(114.275,63.983) 114.249,64.008 114.249,64.948 R15.2 114.376,64.973 115.367,64.973 v1(115.392,64.999) ; v1(114.3,58.801) 114.325,58.826 R9.2 114.427,60.046 115.468,60.046 v1(115.494,60.02) ; v1(117.196,118.415) 117.196,117.5 U10.2 117.323,117.475 v1(118.872,117.475) ; v1(117.373,110.465) U14.2 117.399,111.608 v1(118.847,111.608) ; v1(117.45,104.699) 117.45,105.588 U18.2 v1(118.847,105.664) ; v1(117.475,101.016) U21.2 117.5,100.076 v1(118.897,100.076) ; v1(117.5,73.203) 117.5,74.262 U16.2 v1(119.05,74.295) ; v1(117.5,78.994) 117.5,79.019 117.475,79.045 U12.2 v1(118.999,80.035) ; v1(120.091,90.627) 120.116,90.652 Cx3.2 121.463,90.687 121.463,91.923 121.437,91.948 v1(121.437,92.024) ; v1(133.096,94.234) U7.2 134.62,93.37 v1(134.645,93.396) ; v1(133.172,88.57) U8.2 v1(134.518,87.655)
PGC: C6.5 IC1.39 | length 58
  Top Layer w0.508: IC1.39 86.995,62.814 87.96,63.779 C6.5
PGD: C6.4 IC1.40 | length 62
  Top Layer w0.508: IC1.40 87.681,60.274 90.5,63.094 C6.4
RL: 
S1: C11.3 IC1.2 | length 20.7
  Top Layer w0.508: C11.3 98.044,49.657 99.365,50.978 99.365,52.857 104.242,57.734 104.242,61.519 102.946,62.814 IC1.2
S2: C11.2 IC1.3 | length 28.1
  Top Layer w0.508: C11.2 96.317,46.939 98.933,46.939 100.533,48.539 100.533,52.299 105.689,57.455 105.689,63.322 103.657,65.354 IC1.3
S3: C13.3 IC1.4 | length 27.1
  Top Layer w0.508: IC1.4 105.816,67.894 107.645,66.065 107.645,51.41 105.943,49.708 C13.3
S4: C13.2 IC1.5 | length 33.6
  Top Layer w0.508: IC1.5 105.969,70.434 108.712,67.691 108.712,49.174 106.705,47.168 C13.2
"Sensor _1": C7.2 IC1.38 | length 22.8
  Top Layer w0.508: IC1.38 83.312,65.354 82.296,64.338 82.296,50.394 83.744,48.946 87.173,48.946 C7.2
Sensor_2: C8.2 IC1.37 | length 22.8
  Top Layer w0.508: C8.2 79.987,49.202 80.749,49.202 81.483,49.936 81.483,66.269 83.109,67.894 IC1.37
Sensor_in1: 
Sensor_in2: 
SW1: IC1.6 R8.1 R9.1 | length 21.1
  Top Layer w0.508: IC1.6 105.131,72.974 109.601,68.504 109.601,63.5 110.795,62.306 R8.1 R9.1
SW2: IC1.7 R14.1 R15.1 | length 18.5
  Top Layer w0.508: IC1.7 105.816,75.514 112.039,69.291 R14.1 R15.1
VPP: C6.1 IC1.1 R17.2 SW1.2 | length 72.2
  Top Layer w0.508: IC1.1 98.755,60.274 98.044,60.985 98.044,118.542 C6.1 98.146,118.643 102.393,118.643 SW1.2 104.521,118.669 105.308,117.881 R17.2
pads on no net: IC1.8 IC1.21 IC1.22

## Polygon pours and split planes (outlines as drawn)
no net on Bottom Layer "NONET_L02_P001" (solid, pour order 1): 40.945,122.047
no net on Bottom Layer "NONET_L02_P003" (solid, pour order 3): 40.945,122.047
P_GND on Bottom Layer "P_GND_L02_P000" (solid, remove dead copper, pour order 0): 63.373,121.971 120.777,121.996 120.802,121.971 120.802,95.225 120.853,95.174 136.017,95.174 136.068,95.123 136.068,86.157 121.285,86.157 121.158,86.03 121.158,43.637 63.373,43.637
GND on Bottom Layer "GND_L02_P004" (solid, remove dead copper, pour order 4): 40.945,122.047 148.336,122.047 148.336,38.684 40.97,38.684

## Keep-outs
Keep-Out Layer:
  lines w1: 149.174,37.744 149.174,42.977 149.174,122.784 40.208,122.784 40.208,37.77 149.174,37.77

## Silkscreen, mask and mechanical layers (free items; w line width, h text height)
Top Overlay:
  text "Cau h1" at 49.276,111.531 h0.76 r270
  text "Cau h3" at 142.345,111.357 h0.76 r270
  text "Cau H2" at 48.873,91.951 h0.76 r270
  text "Cau H4" at 138.376,81.868 h0.76
  text "BOM" at 41.224,75.819 h0.76 r270
  text "SW2" at 145.263,65.405 h0.76 r90
  text "COI" at 43.104,65.253 h0.76 r270
  text "LED2" at 43.078,58.242 h0.76 r270
  text "SW1" at 144.958,58.115 h0.76 r90
  text "Sensor1" at 77.343,53.391 h0.76
  text "Sensor2" at 84.299,53.191 h0.76
  text "LED1" at 43.078,50.165 h0.76 r270
  text "P-GND" at 108.356,49.301 h0.76
  text "GND" at 129.083,49.276 h0.76
  text "5V-MCU" at 119.605,49.153 h0.76
  text "5V" at 139.471,48.336 h0.76
  text "Sensor3" at 93.32,40.564 h0.76
  text "Sensor4" at 100.889,40.513 h0.76